# EAGLE board Programmer (EAGLE 7.6.0)
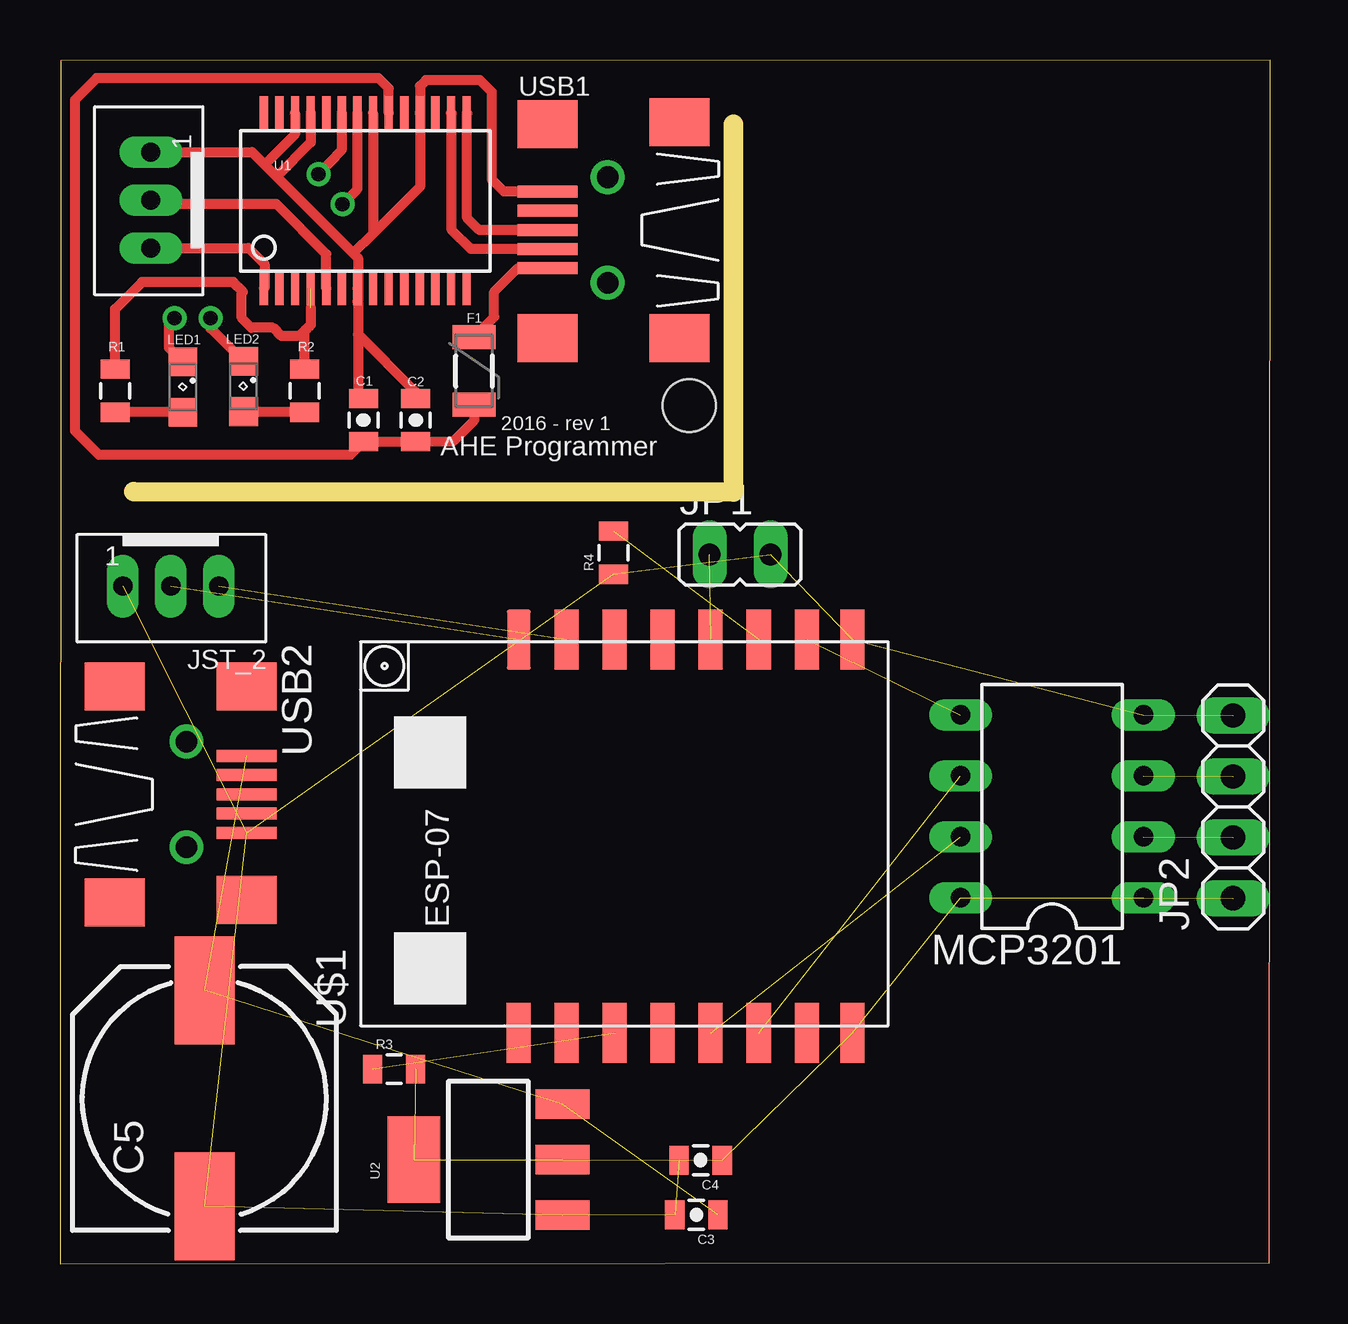
[diagram p0: board, top side]
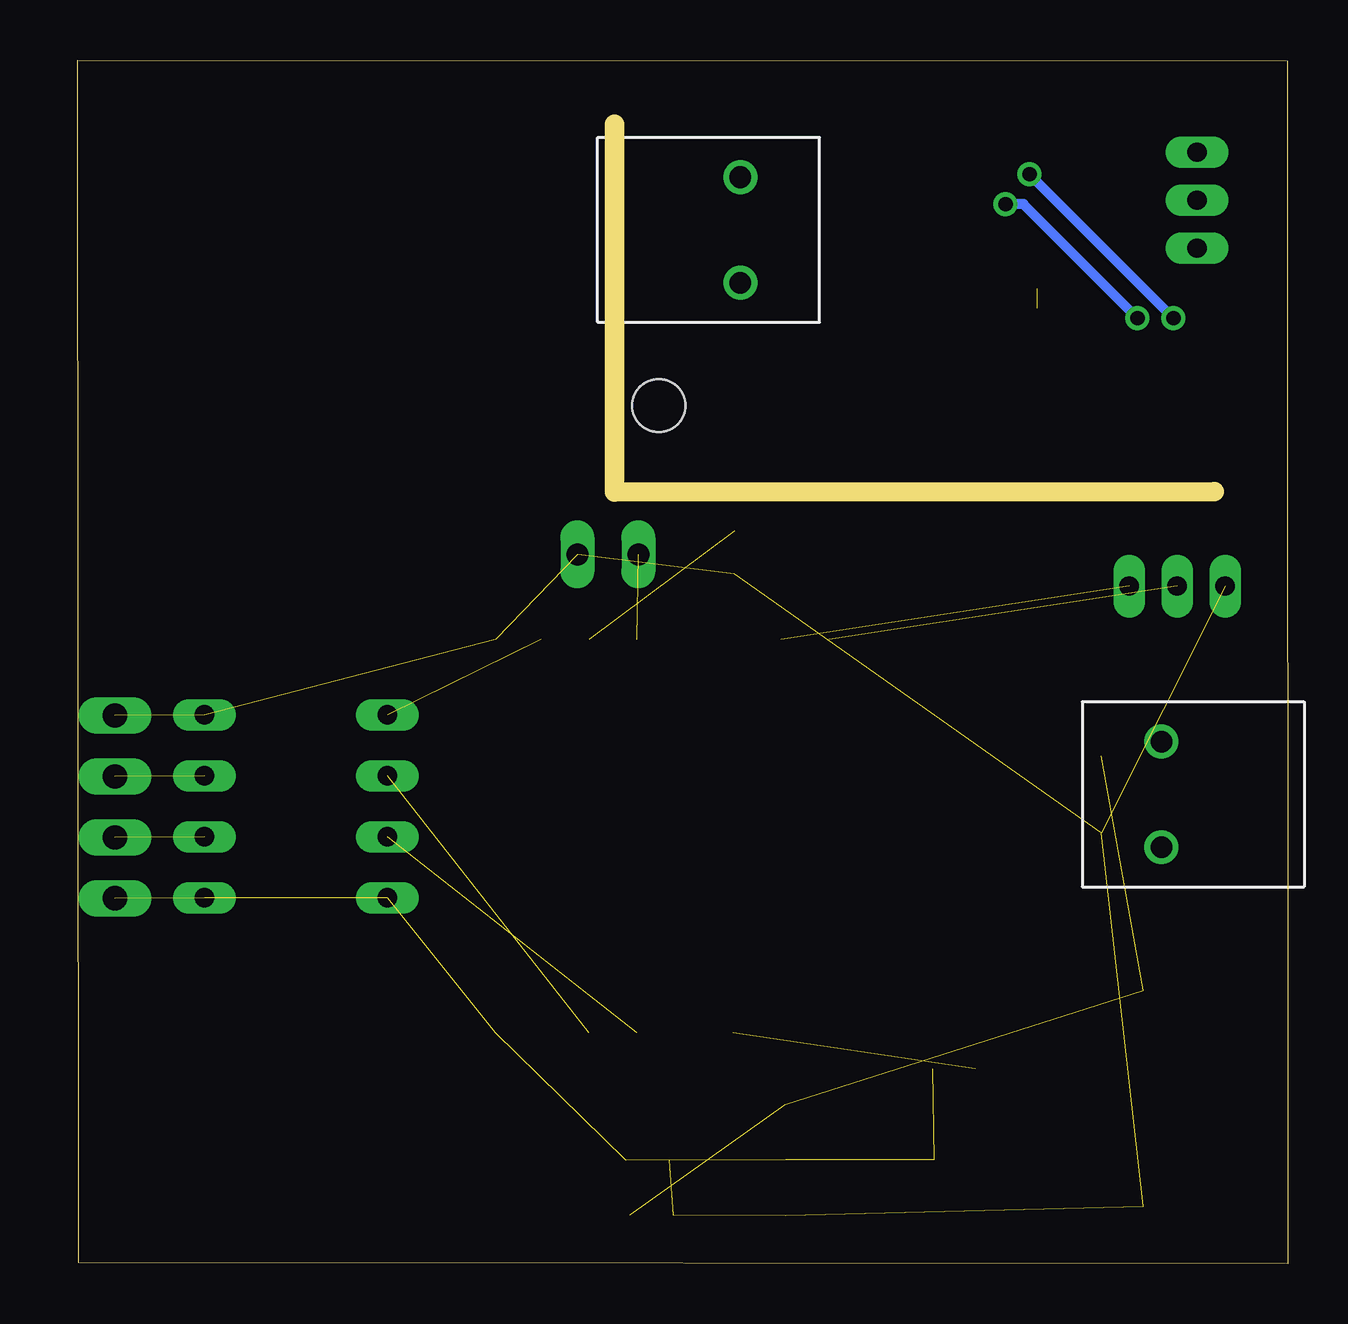
[diagram p1: board, bottom side, seen from below]

Size 50.44 x 50.17 mm. Coordinates in mm from the lower left corner, seen from the top.
Outline: 0,0 50.41,0.02 50.44,50.17 0.03,50.14 0,0
Copper layers (1*16): Top 0.035mm / dielectric 1.5mm / Bottom 0.035mm
Design rules "default": minimum track width 10mil, minimum drill 0.6mm, track to track 8mil, track to pad 8mil, pad to pad 8mil, via to via 8mil, smd to smd 8mil, copper to edge 40mil, drill to drill 8mil, minimum pad ring 10mil, minimum via ring 8mil, stop-mask expansion 4mil, vias tented up to drill 0mil, thermal gap 10mil
Net classes: 0 default: width 0.203 mm; 1 power: width 0.254 mm
Holes 2.2 mm at 26.22,35.76
Milling: 2 lines

## Footprints (pad centres in the part's own frame; a part is rotated, then mirrored left to right if it is on the bottom)
0805-CAP = smd 0.8 x 1.2: 1 -0.9,0; 2 0.9,0
NIC_10X10.5_CAP = smd 4.5 x 2.5: + 4.5,0; - -4.5,0
PTC-1206 = smd 1 x 1.8: 1 -1.4,0; 2 1.4,0
JP1 = drill 0.914 long: 1 0,-1.27; 2 0,1.27
1X04 = drill 1.016 long: 1 -3.81,0; 2 -1.27,0; 3 1.27,0; 4 3.81,0
JST_B3B-PH_HEADER = drill 0.8 long: P1 2.027,0.048; P2 0.028,0.048; P3 -1.972,0.048
SML0805 = smd 1.2 x 1.2: A 1.05,0; C -1.05,0
DIL08 = drill 0.813 long: 1 -3.81,-3.81; 2 -1.27,-3.81; 3 1.27,-3.81; 4 3.81,-3.81; 5 3.81,3.81; 6 1.27,3.81; 7 -1.27,3.81; 8 -3.81,3.81
0805 = smd 0.8 x 1.2: 1 -0.9,0; 2 0.9,0
SSOP28DB = smd 0.348 x 1.397: 1 -4.225,-3.656; 2 -3.575,-3.656; 3 -2.925,-3.656; 4 -2.275,-3.656; 5 -1.625,-3.656; 6 -0.975,-3.656; 7 -0.325,-3.656; 8 0.325,-3.656; 9 0.975,-3.656; 10 1.625,-3.656; 11 2.275,-3.656; 12 2.925,-3.656; 13 3.575,-3.656; 14 4.225,-3.656; 15 4.225,3.656; 16 3.575,3.656; 17 2.925,3.656; 18 2.275,3.656; 19 1.625,3.656; 20 0.975,3.656; 21 0.325,3.656; 22 -0.325,3.656; 23 -0.975,3.656; 24 -1.625,3.656; 25 -2.275,3.656; 26 -2.925,3.656; 27 -3.575,3.656; 28 -4.225,3.656
SOT223 = smd 1.219 x 2.235: 1 -2.311,-3.099; 2 0,-3.099; 3 2.311,-3.099 | smd 3.6 x 2.2: 4 0,3.099
ESP07-16PIN = smd 2.5 x 1: ADC -8.2,3.8; CH_PD -8.2,1.8; GND 8.2,-8.105; GPIO0 8.2,-2.2; GPIO2 8.2,-4.2; GPIO4 8.2,1.8; GPIO5 8.2,-0.2; GPIO12 -8.2,-4.2; GPIO13 -8.2,-6.2; GPIO14 -8.2,-2.2; GPIO15 8.2,-6.2; GPIO16 -8.2,-0.2; REST -8.2,5.8; RX 8.2,3.8; TX 8.2,5.8; VCC -8.2,-8.105
USB-MB-S = smd 2.5 x 0.5: D+ 2.5,0; D- 2.5,0.8; GND 2.5,-1.6; ID 2.5,-0.8; VBUS 2.5,1.6 | smd 2.5 x 2: P$1 -3,-4.5; P$2 -3,4.5; P$3 2.5,-4.4; P$4 2.5,4.5 | drill 0.9: P$5 0,2.2; P$6 0,-2.2

## Placement (x,y rotation side)
C1  0,1  [0805-CAP]  12.65,35.16 90 top
C2  10uF  [0805-CAP]  14.83,35.16 90 top
C3  10uF  [0805-CAP]  26.52,2.04 180 top
C4  0,1  [0805-CAP]  26.7,4.31 180 top
C5  100uF  [NIC_10X10.5_CAP]  6.03,6.89 90 top
F1  500mA  [PTC-1206]  17.25,37.21 270 top
JP1  [JP1]  28.35,29.56 270 top
JP2  [1X04]  48.9,19.04 90 top
JST_1  [JST_B3B-PH_HEADER]  3.83,44.3 90 top
JST_2  [JST_B3B-PH_HEADER]  4.65,28.29 180 top
LED1  Red  [SML0805]  5.12,36.53 270 top
LED2  Green  [SML0805]  7.65,36.56 270 top
MCP3201  [DIL08]  41.35,19.06 90 top
R1  330  [0805]  2.3,36.38 90 top
R2  330  [0805]  10.2,36.38 90 top
R3  10K  [0805]  13.93,8.11 0 top
R4  10K  [0805]  23.07,29.64 90 top
U1  FT232R  [SSOP28DB]  12.72,44.3 0 top
U2  [SOT223]  17.85,4.33 90 top
U$1  ESP07-16PIN  [ESP07-16PIN]  24.92,17.81 90 top
USB1  [USB-MB-S]  22.82,43.08 180 top
USB2  [USB-MB-S]  5.28,19.56 0 top

## Library data of the parts
C1-C4 = SparkFun-Capacitors; PROD_ID: CAP-11330
C5 = SparkFun-Capacitors; PROD_ID: CAP-08362
F1 U1 = SparkFun
JP1 = jumper
JP2 = pinhead-2
JST_1 JST_2 = SRG
LED1 LED2 = led
MCP3201 = ic-package
R1-R4 = SparkFun-Resistors; PROD_ID: RES-09883
U2 = SparkFun-PowerIC; PROD_ID: VREG-08170
U$1 = esp8266modules; DIMENSIONS: 22.0 x 16.0 mm; PINS: 16; PITCH: 0.078" / 2 mm
USB1 USB2 = con-usb-3

## Nets
5V: C3.1 C5.+ U2.3 USB2.VBUS
AN+: JP2.2 MCP3201.2
AN-: JP2.3 MCP3201.3
CLK: MCP3201.7 U$1.GPIO14
CS: MCP3201.5 U$1.GPIO15
CTS: U1.11
DCD: U1.10
DSR: U1.9
DTR: U1.2
GND [power]: C1.2 C2.2 JST_1.P1 U1.7 U1.18 U1.21 U1.25 U1.26 USB1.GND
GND2 [power]: C3.2 C4.2 C5.- JP1.2 JP2.4 JST_2.P1 MCP3201.4 R4.1 U2.1 U$1.GND USB2.GND
MISO: MCP3201.6 U$1.GPIO12
N$1: LED1.A R1.1
N$2: LED2.A R2.1
N$3: F1.1 USB1.VBUS
N$4: R3.1 U$1.CH_PD
N$5: JST_2.P2 U$1.TX
N$6: R4.2 U$1.GPIO2
N$7: JP1.1 U$1.GPIO0
N$8: JST_2.P3 U$1.RX
PWREN: U1.14
RI: U1.6
RTS: U1.3
RXD: JST_1.P2 U1.5
RXLED: LED2.C U1.22
SLEEP: U1.12
TXD: JST_1.P3 U1.1
TXDEN: U1.13
TXLED: LED1.C U1.23
USB_D+: U1.15 USB1.D+
USB_D-: U1.16 USB1.D-
VCC [power]: C4.1 JP2.1 MCP3201.1 MCP3201.8 R3.2 U2.2 U2.4 U$1.VCC
VCC_P [power]: C1.1 C2.1 F1.2 U1.20
VCCIO: R1.2 R2.2 U1.4

## Tracks (layer width: path | path; a pad name or v marks a point on that pad's centre or on a via)
5V  (3 unrouted)
AN+  (1 unrouted)
AN-  (1 unrouted)
CLK  (1 unrouted)
CS  (1 unrouted)
GND
  Top 0.406: U1.7 12.4,40.11 | JST_1.P1 8.01,46.33 8.53,45.81 | 8.53,45.81 9.03,45.31 | 9.03,45.31 12.22,42.11 | 12.22,42.11 12.43,41.91 12.43,40.13 12.4,40.11 | U1.26 9.8,47.08 8.53,45.81 | U1.25 10.45,46.73 9.03,45.31 | U1.21 13.05,42.94 | 13.05,42.94 12.22,42.11 | 13.05,42.94 15,44.88 U1.18 15,49.08 15.25,49.33 17.5,49.33 18,48.83 18,45.19 18.5,44.69 USB1.GND | 12.4,40.11 12.43,40.08 12.43,38.73 | 12.43,38.73 12.43,36.28 C1.2 | C2.2 14.83,36.33 12.43,38.73
GND2  (10 unrouted)
MISO  (1 unrouted)
N$1
  Top 0.406: LED1.A R1.1
N$2
  Top 0.406: R2.1 7.68,35.48 LED2.A
N$3
  Top 0.406: F1.1 18.1,39.45 18.1,40.51 19.07,41.48 USB1.VBUS
N$4  (1 unrouted)
N$5  (1 unrouted)
N$6  (1 unrouted)
N$7  (1 unrouted)
N$8  (1 unrouted)
RXD
  Top 0.406: U1.5 11.1,42.08 9.03,44.16 3.96,44.16 JST_1.P2
RXLED  (via drill 0.6)
  Top 0.406: v11.78,44.16 12.4,44.78 U1.22 | v6.27,39.4 v6.28,39.41 6.28,38.98 LED2.C
  Bottom 0.406: v6.28,39.41 11.03,44.16 v11.78,44.16
TXD
  Top 0.406: JST_1.P3 7.86,42.33 8.53,41.66 8.53,40.67 U1.1
TXLED  (via drill 0.6)
  Top 0.406: v10.78,45.41 11.75,46.44 U1.23 | v4.78,39.41 4.54,39.17 4.54,38.17 LED1.C
  Bottom 0.406: v4.78,39.41 v10.78,45.41
USB_D+
  Top 0.406: USB1.D+ 17.47,43.08 16.97,43.58 16.97,47.93 U1.15
USB_D-
  Top 0.406: USB1.D- 17.12,42.28 16.32,43.08 16.32,47.93 U1.16
VCC  (7 unrouted)
VCC_P
  Top 0.406: U1.20 13.7,48.98 13.28,49.41 1.52,49.41 0.62,48.51 0.62,34.71 1.62,33.71 12.1,33.71 C1.1 C2.1 16.4,34.28 17.27,35.16 17.27,35.79 F1.2
VCCIO  (1 unrouted)
  Top 0.406: R1.2 2.3,39.78 3.42,40.91 7.23,40.91 7.62,40.51 7.58,40.46 7.58,39.41 7.98,39.01 8.88,39.01 9.22,38.66 9.97,38.66 10.2,38.88 | 10.45,39.83 10.45,39.13 10.34,39.02 10.2,38.88 | R2.2 10.2,38.88

## Text on the board
tPlace: 2016 - rev 1 | AHE Programmer